# Altium PCB BullCoolerShield.PcbDoc
Units mil, origin at the board's own origin, x right, y up, seen from the top; angles counter-clockwise.
Board outline 2105 x 3990 mil, 4 copper layers (Top Plane, Signal Plane, Ground Plane, Power Plane), stack 30.634 mil thick; 100 components, 63 nets, 344 pads, 69 vias.
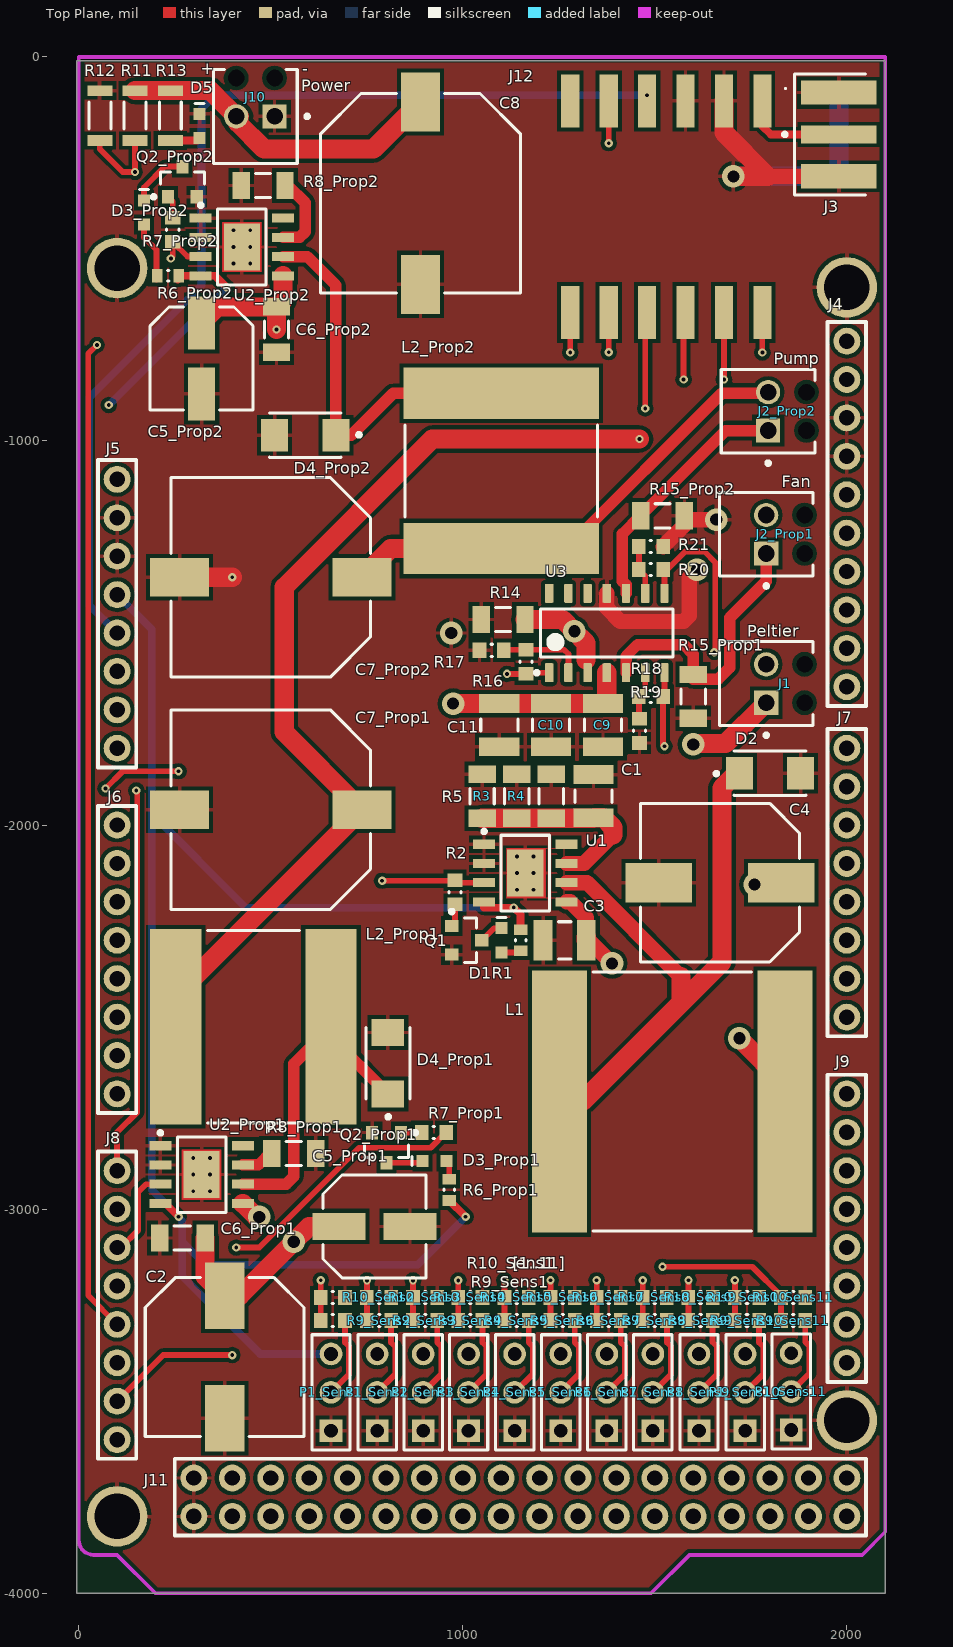
[diagram p0: Top Plane view]
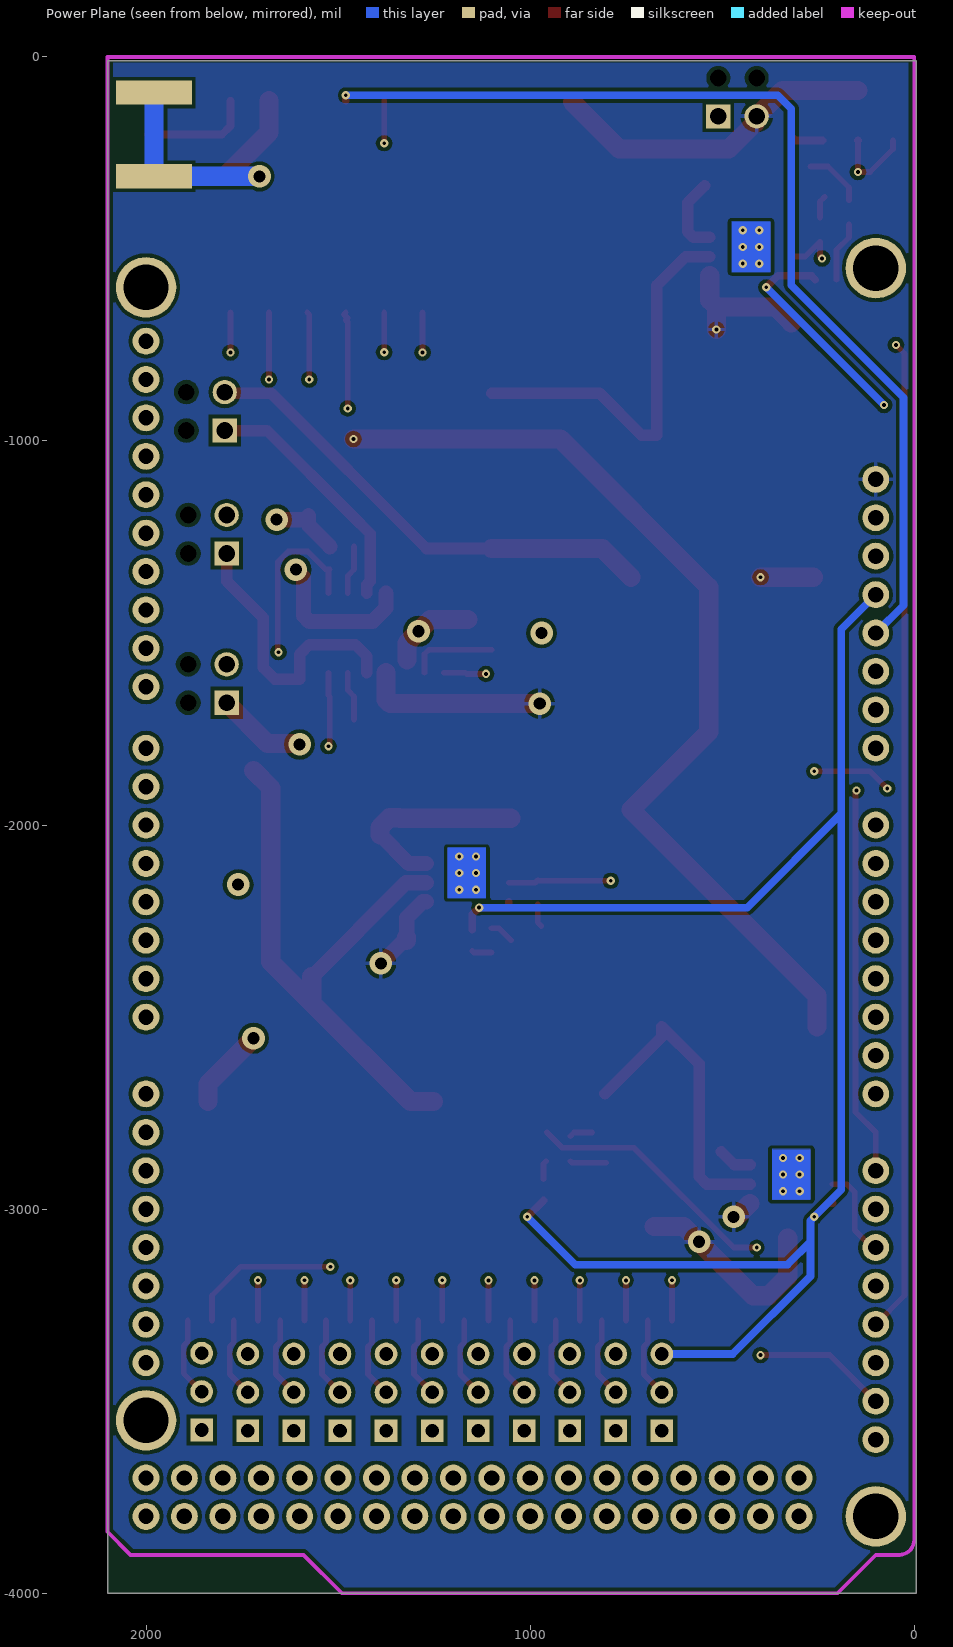
[diagram p1: Power Plane view, seen from below]
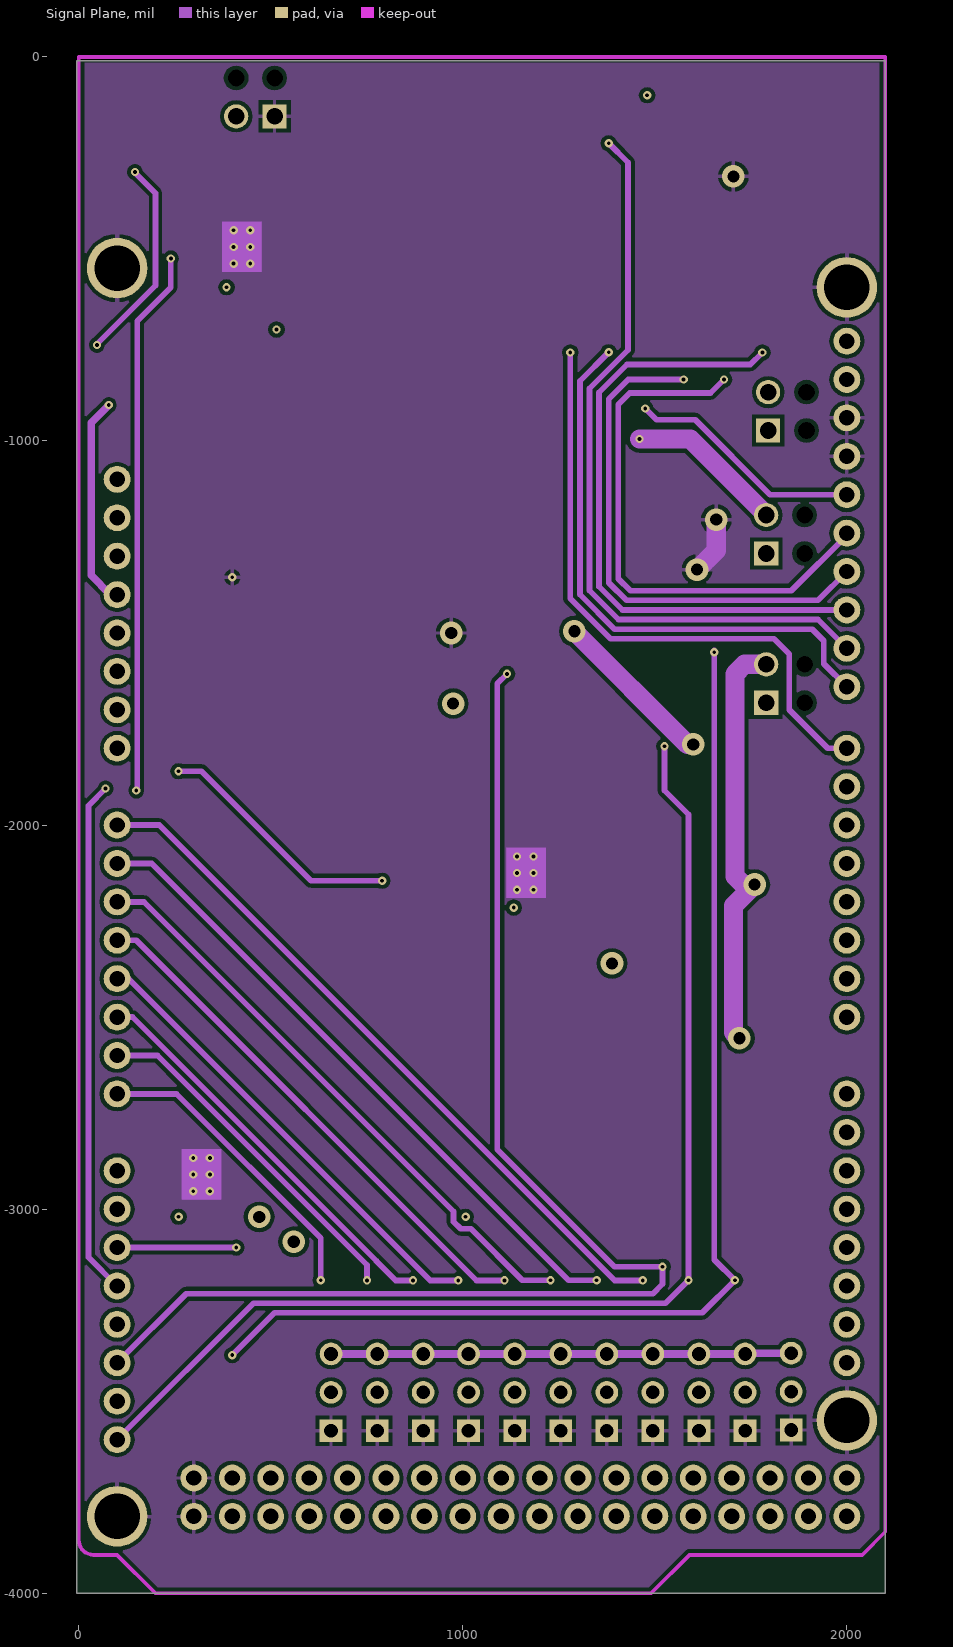
[diagram p2: Signal Plane]
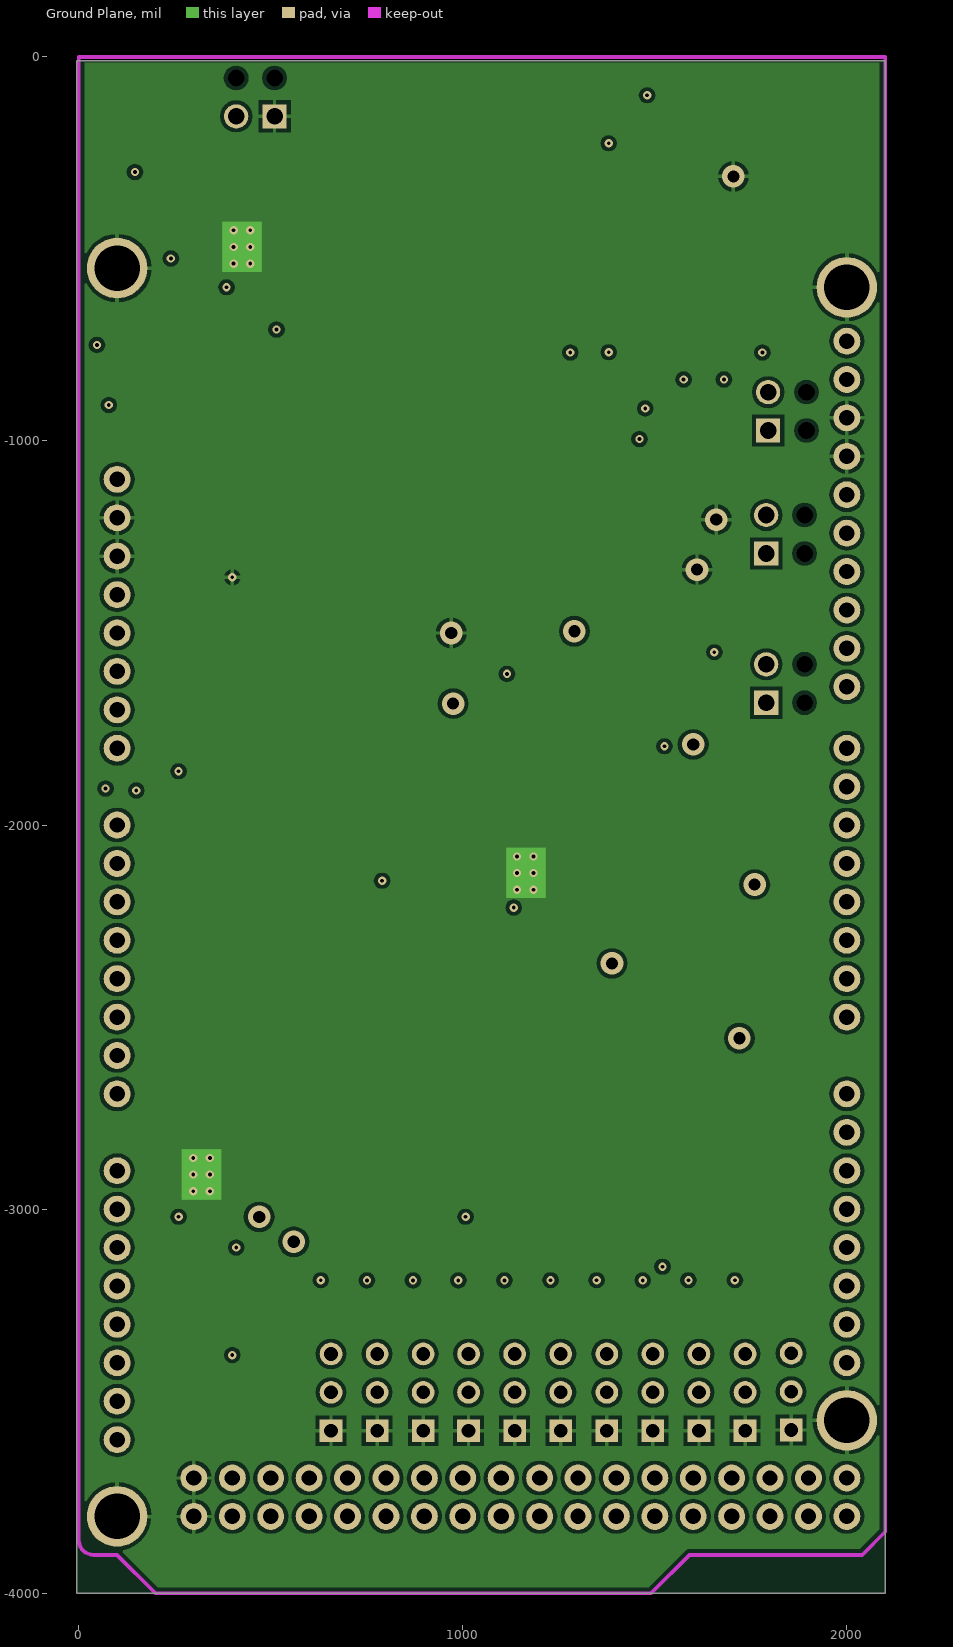
[diagram p3: Ground Plane]

## Layer stack, top to bottom
Top Solder: solder mask 0.4, Solder Resist, Dk 3.5
Top Plane: signal copper 1.4
Dielectric 1: core 10, FR-4, Dk 4.2
Signal Plane: signal copper 1.417
Dielectric 3: prepreg 5, Dk 4.2
Ground Plane: signal copper 1.417
Dielectric 2: core 10, Dk 4.2
Power Plane: signal copper 1.4
Solder Side: solder mask 0.4, Solder Resist, Dk 3.5

## Board outline
-5,-4000 2100,-4000 2100,-10 -5,-10

## Design rules (kind name [scope] priority, off if disabled: settings)
Clearance [All] p1: gap=10 ignorepadtopadclearanceinfootprint=TRUE except(0: Arc-Hole Track-Hole SMDPad-Hole THPad-Hole Via-Hole Fill-Hole Poly-Hole Region-Hole Text-Hole)
PolygonConnect [All] p1: connectstyle=Relief reliefconductorwidth=10 reliefentries=4 polygonreliefangle="90 Angle" airgapwidth=10
RoutingVias RoutingVias_2 [InNetClass('HC4')] p1: holewidth=31.5 width=59.06 viastyle="Through Hole" minholewidth=31.5 minwidth=59.06 maxholewidth=31.5 maxwidth=59.06
RoutingVias RoutingVias_1 [InNetClass('HC')] p2: holewidth=15.75 width=27.56 viastyle="Through Hole" minholewidth=15.75 minwidth=27.56 maxholewidth=15.75 maxwidth=27.56
RoutingVias [All] p3: holewidth=9.84 width=21.65 viastyle="Through Hole" minholewidth=9.84 minwidth=21.65 maxholewidth=9.84 maxwidth=21.65
SolderMaskExpansion [All] p1: expansion=4
Width Width_2 [InNetClass('HC4')] p1: maxlimit=500 minlimit=40 preferedwidth=60 toplayer_maxwidth=100 midlayer1_minwidth=50 midlayer1_maxwidth=100 midlayer2_minwidth=50 bottomlayer_minwidth=50 bottomlayer_maxwidth=100 minimp=50.000000 maximp=50.000000 favimp=50.000000
Width Width_1 [InNetClass('HC')] p2: maxlimit=100 minlimit=30 preferedwidth=50 minimp=50.000000 maximp=50.000000 favimp=50.000000
Width [All] p3: maxlimit=20 minlimit=10 preferedwidth=15 minimp=50.000000 maximp=50.000000 favimp=50.000000
30 further rules are at their usual default settings.

## Classes and differential pairs
net class HC4: +12 AGND NetC1_2 NetC4_1 NetD2_1 NetJ1_1
net class SENS[1..2]: SENS1 SENS2
channel class TemperatureSensor: Sens1 Sens2 Sens3 Sens4 Sens5 Sens6 Sens7 Sens8 Sens9 Sens10 Sens11
channel class ProportionalDrive: Prop1 Prop2
net class PWM[1..2]: PWM1 PWM2
net class HC: +12 AGND NetC7_Prop1_1 NetC7_Prop2_1 NetD4_Prop1_1 NetD4_Prop2_1 NetR8_Prop1_2 NetR8_Prop2_2 SENS1 SENS2
net class AI[1..8]: AI1 AI2 AI3 AI4 AI5 AI6 AI7 AI8 AI9 AI10 AI11
component class TopSheet: C8 C9 C10 C11 D5 J3 J4 J5 J6 J7 J8 J9 J10 J11 J12 R11 R12 R13 R16 R17 R18 R19 R20 R21 U3
component class Sens11: P1_Sens11 R9_Sens11 R10_Sens11
component class Sens10: P1_Sens10 R9_Sens10 R10_Sens10
component class Sens9: P1_Sens9 R9_Sens9 R10_Sens9
component class Sens8: P1_Sens8 R9_Sens8 R10_Sens8
component class Sens7: P1_Sens7 R9_Sens7 R10_Sens7
component class Sens6: P1_Sens6 R9_Sens6 R10_Sens6
component class Sens5: P1_Sens5 R9_Sens5 R10_Sens5
component class Sens4: P1_Sens4 R9_Sens4 R10_Sens4
component class Sens3: P1_Sens3 R9_Sens3 R10_Sens3
component class Sens2: P1_Sens2 R9_Sens2 R10_Sens2
component class Sens1: P1_Sens1 R9_Sens1 R10_Sens1
component class Prop2: C5_Prop2 C6_Prop2 C7_Prop2 D3_Prop2 D4_Prop2 J2_Prop2 L2_Prop2 Q2_Prop2 R6_Prop2 R7_Prop2 R8_Prop2 R15_Prop2 U2_Prop2
component class Prop1: C5_Prop1 C6_Prop1 C7_Prop1 D3_Prop1 D4_Prop1 J2_Prop1 L2_Prop1 Q2_Prop1 R6_Prop1 R7_Prop1 R8_Prop1 R15_Prop1 U2_Prop1
component class Designator: C1 C2 C3 C4 D1 D2 J1 L1 Q1 R1 R2 R3 R4 R5 R14 U1

## Components (designator, comment, footprint, x,y, rotation, side; value= is the part's Value field where it differs from the comment)
C1 "100nF C-1206" C-1206 1340.45,-1925 r270 top value=100nF
C2 "220uF 50V Poly" CAPAE127P600-8N 380,-3385 r270 top
C3 "100nF C-1206" C-1206 1265.45,-2300 r0 top value=100nF
C4 "220uF 50V Poly" CAPAE127P600-8N 1670,-2150 r180 top
C5_Prop1 "47uF 50V AuPoly" EEH-ZA1H220P 770,-3045 r0 top (schematic designator C5)
C5_Prop2 "47uF 50V AuPoly" EEH-ZA1H220P 320,-785 r270 top (schematic designator C5)
C6_Prop1 "10uF 50V 1206" CAPC1206(3216)190_N 270,-3075 r0 top value=10uF (schematic designator C6)
C6_Prop2 "10uF 50V 1206" CAPC1206(3216)190_N 515,-710 r90 top value=10uF (schematic designator C6)
C7_Prop1 "470uF 50V AuPoly" CAPAE137130X163M 500,-1960 r180 top (schematic designator C7)
C7_Prop2 "470uF 50V AuPoly" CAPAE137130X163M 500,-1355 r180 top (schematic designator C7)
C8 "470uF 50V AuPoly" CAPAE137130X163M 890,-355 r270 top
C9 "100nF C-1206" C-1206 1365,-1740 r90 top value=100nF
C10 "100nF C-1206" C-1206 1230,-1740 r90 top value=100nF
C11 "100nF C-1206" C-1206 1095,-1740 r90 top value=100nF
D1 "LED Green" 0603_A 1100.45,-2300 r270 top
D2 "SK34A" FP-DO-214AC-MFG 1800,-1865 r0 top
D3_Prop1 "LED Green" 0603_A 926.5,-2875 r0 top (schematic designator D3)
D3_Prop2 "LED Green" 0603_A 170,-405 r270 top (schematic designator D3)
D4_Prop1 "SK34A" FP-DO-214AC-MFG 805,-2620 r90 top (schematic designator D4)
D4_Prop2 "SK34A" FP-DO-214AC-MFG 590,-985 r180 top (schematic designator D4)
D5 "LED Green" 0603_A 315,-180 r270 top
J1 "1725656" PHOE-1725656-2 1790,-1631.5 r90 top
J2_Prop1 "1725656" PHOE-1725656-2 1790,-1242.91 r90 top (schematic designator J2)
J2_Prop2 "1725656" PHOE-1725656-2 1795,-922.91 r90 top (schematic designator J2)
J3 "CON-SMA-EDGE-S" FP-CON-SMA-EDGE-S-MFG 2265,-202.01 r270 top
J4 "Header10x1" Header10x1 2000,-740 r270 top
J5 "Header8x1" Header8x1 100,-1800 r90 top
J6 "Header8x1" Header8x1 100,-2700 r90 top
J7 "Header8x1" Header8x1 2000,-1800 r270 top
J8 "Header8x1" Header8x1 100,-3600 r90 top
J9 "Header8x1" Header8x1 2000,-2700 r270 top
J10 "1725656" PHOE-1725656-2 460,-155 r180 top
J11 "Header18x2" Header18x2 2000,-3700 r180 top
J12 "Zeta433" Zeta433-SM 1530,-390 r270 top
L1 "100uH" INDC177172X70N 1545.45,-2720 r0 top
L2_Prop1 "330uH" L1212 455,-2525 r180 top (schematic designator L2)
L2_Prop2 "330uH" L1212 1100,-1078.03 r270 top (schematic designator L2)
P1_Sens1 "Header 3" HDR1X3 656.94,-3577 r90 top (schematic designator P1)
P1_Sens2 "Header 3" HDR1X3 776.94,-3577 r90 top (schematic designator P1)
P1_Sens3 "Header 3" HDR1X3 896.94,-3577 r90 top (schematic designator P1)
P1_Sens4 "Header 3" HDR1X3 1015,-3577 r90 top (schematic designator P1)
P1_Sens5 "Header 3" HDR1X3 1135,-3577 r90 top (schematic designator P1)
P1_Sens6 "Header 3" HDR1X3 1255,-3577 r90 top (schematic designator P1)
P1_Sens7 "Header 3" HDR1X3 1375,-3577 r90 top (schematic designator P1)
P1_Sens8 "Header 3" HDR1X3 1495,-3577 r90 top (schematic designator P1)
P1_Sens9 "Header 3" HDR1X3 1615,-3577 r90 top (schematic designator P1)
P1_Sens10 "Header 3" HDR1X3 1735,-3577 r90 top (schematic designator P1)
P1_Sens11 "Header 3" HDR1X3 1855,-3575 r90 top (schematic designator P1)
Q1 "BC846BLT3G" ONSC-SOT-23-3-318-08_V 1010.45,-2300 r0 top
Q2_Prop1 "BC846BLT3G" ONSC-SOT-23-3-318-08_V 801.5,-2840 r270 top (schematic designator Q2)
Q2_Prop2 "BC846BLT3G" ONSC-SOT-23-3-318-08_V 270,-325 r90 top (schematic designator Q2)
R1 "500R" RESC0603(1608)_L 1150.45,-2300 r90 top value="510.00 Ohm"
R2 "10K" RESC0603(1608)_N 980,-2175 r270 top value="10000.00 Ohm"
R3 "1R 1206" RESC1206(3216)_N 1050.45,-1925 r270 top value="1.20 Ohm"
R4 "1R 1206" RESC1206(3216)_N 1140.45,-1925 r270 top value="1.20 Ohm"
R5 "1R 1206" RESC1206(3216)_N 1230.45,-1925 r270 top value="1.20 Ohm"
R6_Prop1 "500R" RESC0603(1608)_L 965,-2950 r270 top value="510.00 Ohm" (schematic designator R6)
R6_Prop2 "500R" RESC0603(1608)_L 232.6,-570 r0 top value="510.00 Ohm" (schematic designator R6)
R7_Prop1 "10K" RESC0603(1608)_N 925,-2800 r180 top value="10000.00 Ohm" (schematic designator R7)
R7_Prop2 "10K" RESC0603(1608)_N 245,-450 r90 top value="10000.00 Ohm" (schematic designator R7)
R8_Prop1 "1R 1206" RESC1206(3216)_N 560,-2855 r180 top value="1.20 Ohm" (schematic designator R8)
R8_Prop2 "1R 1206" RESC1206(3216)_N 480,-335 r0 top value="1.20 Ohm" (schematic designator R8)
R9_Sens1 "2K7" RESC0603(1608)_N 661.94,-3290 r0 top value="10000.00 Ohm" (schematic designator R9)
R9_Sens2 "2K7" RESC0603(1608)_N 781.94,-3290 r0 top value="10000.00 Ohm" (schematic designator R9)
R9_Sens3 "2K7" RESC0603(1608)_N 901.94,-3290 r0 top value="10000.00 Ohm" (schematic designator R9)
R9_Sens4 "2K7" RESC0603(1608)_N 1020,-3290 r0 top value="10000.00 Ohm" (schematic designator R9)
R9_Sens5 "2K7" RESC0603(1608)_N 1140,-3290 r0 top value="10000.00 Ohm" (schematic designator R9)
R9_Sens6 "2K7" RESC0603(1608)_N 1260,-3290 r0 top value="10000.00 Ohm" (schematic designator R9)
R9_Sens7 "2K7" RESC0603(1608)_N 1380,-3290 r0 top value="10000.00 Ohm" (schematic designator R9)
R9_Sens8 "2K7" RESC0603(1608)_N 1500,-3290 r0 top value="10000.00 Ohm" (schematic designator R9)
R9_Sens9 "2K7" RESC0603(1608)_N 1618.95,-3290 r0 top value="10000.00 Ohm" (schematic designator R9)
R9_Sens10 "2K7" RESC0603(1608)_N 1740,-3290 r0 top value="10000.00 Ohm" (schematic designator R9)
R9_Sens11 "2K7" RESC0603(1608)_N 1860,-3290 r0 top value="10000.00 Ohm" (schematic designator R9)
R10_Sens1 "3K3" RESC0603(1608)_N 661.94,-3230 r180 top value="10000.00 Ohm" (schematic designator R10)
R10_Sens2 "3K3" RESC0603(1608)_N 781.94,-3230 r180 top value="10000.00 Ohm" (schematic designator R10)
R10_Sens3 "3K3" RESC0603(1608)_N 901.94,-3230 r180 top value="10000.00 Ohm" (schematic designator R10)
R10_Sens4 "3K3" RESC0603(1608)_N 1020,-3230 r180 top value="10000.00 Ohm" (schematic designator R10)
R10_Sens5 "3K3" RESC0603(1608)_N 1140,-3230 r180 top value="10000.00 Ohm" (schematic designator R10)
R10_Sens6 "3K3" RESC0603(1608)_N 1260,-3230 r180 top value="10000.00 Ohm" (schematic designator R10)
R10_Sens7 "3K3" RESC0603(1608)_N 1380,-3230 r180 top value="10000.00 Ohm" (schematic designator R10)
R10_Sens8 "3K3" RESC0603(1608)_N 1500,-3230 r180 top value="10000.00 Ohm" (schematic designator R10)
R10_Sens9 "3K3" RESC0603(1608)_N 1618.95,-3230 r180 top value="10000.00 Ohm" (schematic designator R10)
R10_Sens10 "3K3" RESC0603(1608)_N 1740,-3230 r180 top value="10000.00 Ohm" (schematic designator R10)
R10_Sens11 "3K3" RESC0603(1608)_N 1860,-3230 r180 top value="10000.00 Ohm" (schematic designator R10)
R11 "10K5 1206" R-1206 146.5,-152.8 r90 top value="10000.00 Ohm"
R12 "3K3 1206" R-1206 55,-152.8 r270 top value="10000.00 Ohm"
R13 "2K5 1206" R-1206 238.5,-152.8 r90 top value="10000.00 Ohm"
R14 "10m 1206" RESC1206(3216)_N 1105,-1465 r0 top value="1.20 Ohm"
R15_Prop1 "10m 1206" RESC1206(3216)_N 1600,-1665 r90 top value="1.20 Ohm" (schematic designator R15)
R15_Prop2 "10m 1206" RESC1206(3216)_N 1520,-1195 r180 top value="1.20 Ohm" (schematic designator R15)
R16 "2M5" RESC0603(1608)_N 1165,-1575 r270 top value="10000.00 Ohm"
R17 "5K" RESC0603(1608)_N 1075,-1545 r0 top value="10000.00 Ohm"
R18 "990K" RESC0603(1608)_N 1490,-1665 r0 top value="10000.00 Ohm"
R19 "10K" RESC0603(1608)_N 1460,-1755 r90 top value="10000.00 Ohm"
R20 "990K" RESC0603(1608)_N 1490,-1335 r0 top value="10000.00 Ohm"
R21 "10K" RESC0603(1608)_N 1490,-1275 r180 top value="10000.00 Ohm"
U1 "DRV8870" SOIC127P600X170_HS-9N 1162.72,-2125 r0 top
U2_Prop1 "DRV8870" SOIC127P600X170_HS-9N 320,-2910 r0 top (schematic designator U2)
U2_Prop2 "DRV8870" SOIC127P600X170_HS-9N 425,-495 r0 top (schematic designator U2)
U3 "LM324MX" D0014A_L 1375,-1500 r90 top

## Footprints (in the part's own frame and the unit in brackets; to place one, negate y for a bottom-side part, rotate by r counter-clockwise, add the part's x,y. Pads: shape width x height; smd on the part's side, far side on the other; paste and mask are expansions set on the pad)
0603_A [mm] "Chip LED, 2-Leads, Body 1.6x0.8mm, IPC Medium Density"
  rect 0.8x0.8 smd: 1(-0.8,0) 2(0.8,0)
  silkscreen extent -1.5,-0.3 -1.5,0.3, body extent -0.8,-0.4 0.8,0.4, height 0.7
C-1206 [mm]
  rect 1.25x2.65 smd: 1(-1.425,0) 2(1.425,0)
  silkscreen extent -0.4,-1.22 0.4,1.23, body extent -1.65,-1.3 1.65,1.3, height 2.5
CAPAE127P600-8N [mm] "Aluminium Polymer Capacitor"
  rect 4.4x2.6 smd: 1(-4.05,0) 2(4.05,0)
  silkscreen extent -5.25,-5.25 5.25,5.25, body extent -5.25,-5.25 5.25,5.25, height 16.8
CAPAE137130X163M [mm] "Aluminum Electrolytic Capacitor, Body 13.00x13.00x16.30mm, IPC Low Density"
  rect 3.9x2.55 smd: 1(-6.025,0) 2(6.025,0)
  silkscreen extent -6.6,-6.6 6.6,6.6, body extent -6.85,-6.6 6.85,6.6, height 16.3
CAPC1206(3216)190_N [mm] "Chip Capacitor, Body 3.2x1.6mm, Height 1.9mm, IPC Medium Density"
  rect 1.15x1.8 smd: 1(-1.5,0) 2(1.5,0)
  silkscreen extent -0.55,-0.8 0.55,0.8, body extent -1.7,-0.9 1.7,0.9, height 1.9
D0014A_L [mm] "SOIC, 14-Leads, Body 8.75x4mm, Pitch 1.27mm, IPC High Density"
  rrect18% 1.25x0.55 smd: 1(-2.625,3.81) 2(-2.625,2.54) 3(-2.625,1.27) 4(-2.625,0) 5(-2.625,-1.27) 6(-2.625,-2.54) 7(-2.625,-3.81) 8(2.625,-3.81) 9(2.625,-2.54) 10(2.625,-1.27) 11(2.625,0) 12(2.625,1.27) 13(2.625,2.54) 14(2.625,3.81)
  silkscreen extent -2.75,-4.38 1.6,4.76, body extent -3.02,-4.32 3.02,4.32, height 1.59
EEH-ZA1H220P [mm] "Aluminium Polymer"
  rect 3.5x1.8 smd: 1(-2.35,0) 2(2.35,0)
  silkscreen extent -3.4,-3.4 3.4,3.4, body extent -3.4,-3.4 3.4,3.4, height 6.1
FP-CON-SMA-EDGE-S-MFG [mm]
  rect 1.2x5 smd paste+0 mask+0: 1(0,-7.26)
  rect 1.6x5 smd paste+0 mask+0: 2(-2.77,-7.26) 3(2.77,-7.26)
  rect 1.6x5 smd far side paste+0 mask+0: 4(-2.77,-7.26) 5(2.77,-7.26)
  silkscreen extent -4,-10.96 4,-5.5, body extent -3.67,-9.86 3.67,4.86, height 0.25
FP-DO-214AC-MFG [mm]
  rect 1.78x2.16 smd paste+0 mask+0: 1(-2.025,0) 2(2.025,0)
  silkscreen extent -3.67,-1.46 2.37,1.46, body extent -3.02,-1.56 3.02,1.56, height 0.25
HDR1X3 [mm] "Connector; Header; 3 Position"
  rect 1.5x1.5 hole 0.9: 1(0,0)
  round 1.5 hole 0.9: 2(2.54,0) 3(5.08,0)
  silkscreen extent -1.27,-1.27 6.35,1.27
Header8x1 [mil]
  round 70 hole 40: 1(0,0) 2(100,0) 3(200,0) 4(300,0) 5(400,0) 6(500,0) 7(600,0) 8(700,0)
  silkscreen extent -50,-50 750,50
Header10x1 [mil]
  round 70 hole 40: 1(0,0) 2(100,0) 3(200,0) 4(300,0) 5(400,0) 6(500,0) 7(600,0) 8(700,0) 9(800,0) 10(900,0)
  silkscreen extent -50,-50 950,50
Header18x2 [mil]
  round 70 hole 40: 1(0,0) 2(0,100) 3(100,0) 4(100,100) 5(200,0) 6(200,100) 7(300,0) 8(300,100) 9(400,0) 10(400,100) 11(500,0) 12(500,100) 13(600,0) 14(600,100) 15(700,0) 16(700,100) 17(800,0) 18(800,100) 19(900,0) 20(900,100) 21(1000,0) 22(1000,100) 23(1100,0) 24(1100,100) 25(1200,0) 26(1200,100) 27(1300,0) 28(1300,100) 29(1400,0) 30(1400,100) 31(1500,0) 32(1500,100) 33(1600,0) 34(1600,100) 35(1700,0) 36(1700,100)
  silkscreen extent -50,-50 1750,150
INDC177172X70N [mm] "Chip Inductor, 2-Leads, Body 17.70x17.20mm, IPC Medium Density"
  rect 3.65x17.34 smd: 1(-7.455,0) 2(7.455,0)
  silkscreen extent -5.25,-8.57 5.25,8.57, body extent -8.85,-8.6 8.85,8.6, height 7
L1212 [mm]
  rect 3.4x12.94 smd: 1(-5.13,0) 2(5.13,0)
  silkscreen extent -3.05,-6.37 3.05,6.37, body extent -6.4,-6.4 6.4,6.4, height 10
ONSC-SOT-23-3-318-08_V [mm] "SOT23, 3-Leads, Body 2.92x1.3mm, Pitch 0.95mm"
  rect 0.9x0.8 smd: 1(-1,0.95) 2(-1,-0.95) 3(1,0)
  silkscreen extent -1.12,-1.46 0.65,2.02, body extent -0.65,-1.46 0.65,1.46, height 1.11
PHOE-1725656-2 [mm] "Connector, 2-Leads, Body 6.2x5.4mm, Pitch 2.54mm"
  rect 1.6x1.6 hole 1.1: 1(-1.27,0)
  round 1.6 hole 1.1: 2(1.27,0)
  round 0 hole 1.1 unplated: MH1(-1.27,-2.54) MH2(1.27,-2.54)
  silkscreen extent -3.54,-3.1 2.77,3.1, body extent -2.77,-3.1 2.77,3.1, height 9
R-1206 [mm]
  rect 0.7x1.65 smd: 1(-1.65,0) 2(1.65,0)
  silkscreen extent -0.9,-0.72 0.9,0.72, body extent -1.6,-0.8 1.6,0.8, height 0.55
RESC0603(1608)_L [mm] "Chip Resistor, Body 1.6x0.8mm, IPC High Density"
  rect 0.7x0.9 smd: 1(-0.7,0) 2(0.7,0)
  silkscreen extent -0.05,-0.35 0.05,0.35, body extent -0.85,-0.47 0.85,0.47, height 0.6
RESC0603(1608)_N [mm] "Chip Resistor, Body 1.6x0.8mm, IPC Medium Density"
  rect 0.9x1 smd: 1(-0.8,0) 2(0.8,0)
  silkscreen extent -0.05,-0.4 0.05,0.4, body extent -0.85,-0.47 0.85,0.47, height 0.6
RESC1206(3216)_N [mm] "Chip Resistor, Body 3.2x1.6mm, IPC Medium Density"
  rect 1.15x1.8 smd: 1(-1.45,0) 2(1.45,0)
  silkscreen extent -0.5,-0.8 0.5,0.8, body extent -1.67,-0.87 1.67,0.87, height 0.75
SOIC127P600X170_HS-9N [mm] "SOIC, 8-Leads, Body 4.90x3.90mm, Pitch 1.27mm, Thermal Pad 3.10x2.40mm, IPC Medium Density"
  rect 1.45x0.6 smd: 1(-2.725,1.905) 2(-2.725,0.635) 3(-2.725,-0.635) 4(-2.725,-1.905) 5(2.725,-1.905) 6(2.725,-0.635) 7(2.725,0.635) 8(2.725,1.905)
  rect 2.4x3.1 smd: 1(0,0)
  silkscreen extent -2.85,-2.5 1.6,2.88, body extent -3,-2.5 3,2.5, height 1.7
Zeta433-SM [mm] "Chip Array, Concave, 12-Leads, Pitch 2.54mm,  Body 16.00x16.50mm,  IPC Medium Density"
  rect 3.5x1.2 smd: 1(-7,6.35) 2(-7,3.81) 3(-7,1.27) 4(-7,-1.27) 5(-7,-3.81) 6(-7,-6.35) 7(7,-6.35) 8(7,-3.81) 9(7,-1.27) 10(7,1.27) 11(7,3.81) 12(7,6.35)
  silkscreen extent -7.86,7.84 -7.76,7.94, body extent -8.3,-8 8.3,8, height 2

## Part data
C1 C3 C9 C10 C11: library part C-1206, "Ceramic 50V 1206", Case-EIA=1206, Case-Metric=3216, Rated Voltage="50 V", Tolerance=±20%, Max Thickness="1 mm", Technology=SMT
C2 C4 C5_Prop1 C5_Prop2 C7_Prop1 C7_Prop2 C8: library part C-Poly, Capacitance=22000000pF, Case Code=D, Case Style=Molded, Manufacturer=AVX, Operating Temp Range=-55Cto125C, Package / Case=7343-31, Package Description="2-Pin Surface Mount Device, Body 7.3 x 4.35 mm", Tolerance (+ or -)=10%, Voltage=25VDC, Construction=SMTChip, Datasheet URL=https://datasheet.ciiva.com/11793/0900766b80066cb4-11793194.pdf, Datasheet Version=02/2004, DCL=5.5uA, DELETED=Compliant, DF=6%, ESR=0.2ohm, Failure Rate=NotRequired, Insulation=NotRequired, Lead Spacing (nom)=NotRequiredmm, Length W/Weld=NotRequiredmm, Length W/Weld (max)=NotRequiredmm, Manufacturer URL=http://www.avx.com/, Mounting Style=SurfaceMount, Mounting Technology=SurfaceMount, Package Reference=7343-31, Packaging=TapeandReel, Polarity=Polar, Product Depth (mm)=4.3mm, Product Diameter (mm)=NotRequiredmm, Product Height (mm)=2.9mm, Product Length (mm)=7.3mm, Rad Hardened=No, Seal=NotRequired, Seated Plane Height=NotRequiredmm, Wire Form=NotRequired
C6_Prop1 C6_Prop2: library part CMP-1037-04983-1, "CAP 10uF 50V ±20% 1206 (3216 Metric) Thickness 1.9mm SMD", Case-EIA=1206, Case-Metric=3216, Rated Voltage="50 V", Tolerance=±20%, Max Thickness="1.9 mm", Technology=SMT
D1 D3_Prop1 D3_Prop2 D5: library part CMP-1426-00002-1, "SMD mono-color Chip LED, WL-SMCW, Green", Color=Green, Manufacturer="Wuerth Elektronik", PartNumber=150060GS75000, ComponentLink1Description="Manufacturer URL", ComponentLink1URL=http://www.we-online.com, ComponentLink2Description=Datasheet, ComponentLink2URL=http://katalog.we-online.com/led/datasheet/150060GS75000.pdf, PackageReference=0603_A
D2 D4_Prop1 D4_Prop2: library part CMP-56206-000004-1, "DIODE SCHOTTKY 5A 30V SMA", Average Rectified Current=5A, Case/Package=SMA, Max Reverse Voltage (DC)=30V, Mount="Surface Mount", Packaging="Tape and Reel"
J1 J2_Prop1 J2_Prop2 J10: library part CMP-2000-05299-1, "Male Header, Pitch 2.54 mm, 1 x 2 Position, Height 9 mm, Tail Length 3.5 mm", Colour=Green, Manufacturer="Phoenix Contact", Content=250pc(s), Datasheet URL=http://datasheet.octopart.com/1725656-Phoenix-Contact-datasheet-5302866.pdf, Datasheet Version=Apr-08, Industrial packaging=Yes, Manufacturer part No.=1725656, Manufacturer URL=http://www.phoenixcontact.com/, Number of contacts=2, Pitch=2.54mm, Type=MPT0,5/2-2,54
J3: library part CMP-204357-000001-1, "CONN SMA JACK STR EDGE MNT", Frequency=18GHz, Manufacturer="RF Solutions Ltd.", Package=CONN_JACK, Automotive=No, Category=Conn, ComponentLink2Description=Datasheet, ComponentLink2URL=https://www.rfsolutions.co.uk/downloads/1498648656DS-CON-EDGE-SMA-4.pdf, Conn Orientation="Right Angle", Contact Material=Gold, Device Class L1=Connectors, Device Class L2="RF / Coaxial Connectors", Device Class L3=unset, Digikey Description="CONN SMA JACK STR EDGE MNT", Footprint Url=https://forum.upverter.com/uploads/default/original/3X/b/e/be75b907af57498775929d6d9099689c472e0307.pdf, Height=6.35mm, Impedance=50O, Is Female=yes, Lead Free=Yes, Manufacturer Part Number=CON-SMA-EDGE-S, Number of contacts=1, Octopart=https://octopart.com/con-sma-edge-s-rf+solutions-70967450, RoHS=TRUE, Shielding=true
L1: library part Inductor1717, "PA4344.104NLT / https://products.pulseelex.com/files/product_files/P771.pdf", Inductance="1.50 µH", Manufacturer="Wuerth Elektronik", PartNumber=74479763215, ComponentLink1Description="Manufacturer URL", ComponentLink1URL=http://www.we-online.com, ComponentLink2Description=Datasheet, ComponentLink2URL=http://katalog.we-online.de/kataloge/eisos/media/pdf/74479763215.pdf, PackageReference="SMD 0603_A"
L2_Prop1 L2_Prop2: library part Inductor1212, Inductance="1.50 µH", Manufacturer="Wuerth Elektronik", PartNumber=74479763215, ComponentLink1Description="Manufacturer URL", ComponentLink1URL=http://www.we-online.com, ComponentLink2Description=Datasheet, ComponentLink2URL=http://katalog.we-online.de/kataloge/eisos/media/pdf/74479763215.pdf, PackageReference="SMD 0603_A"
P1_Sens1 P1_Sens2 P1_Sens3 P1_Sens4 P1_Sens5 P1_Sens6 P1_Sens7 P1_Sens8 P1_Sens9 P1_Sens10 P1_Sens11: "Header, 3-Pin", LatestRevisionDate=17-Jul-2002, LatestRevisionNote="Re-released for DXP Platform.", Publisher="Altium Limited"
Q1 Q2_Prop1 Q2_Prop2: library part CMP-1048-00780-1, "General Purpose Transistor, NPN Silicon, 3-Pin SOT-23, Pb-Free, Tape and Reel", Manufacturer="On Semiconductor", ComponentLink1Description="Manufacturer URL", ComponentLink1URL=http://www.onsemi.com/, ComponentLink2Description=Datasheet, ComponentLink2URL=http://www.onsemi.cn/pub_link/Collateral/BC846ALT1-D.PDF, ComponentLink3Description="Package Specification", ComponentLink3URL=http://www.onsemi.cn/pub_link/Collateral/318-08.PDF, DatasheetVersion="Rev. 11", fT Min (MHz)=100, IC Continuous (A)=0.1, Mounting Technology="Surface Mount", PackageDescription="3-Pin Small Outline Transistor, Body 2.92 x 1.3 mm, Pitch 0.95 mm", PackageReference=SOT-23-3-318-08, PackageVersion="Rev. AP, 11/2009", Packing="Tape and Reel", PartNumber=BC846BLT3G, Polarity=NPN, RoHS=TRUE
R1 R6_Prop1 R6_Prop2: library part CMP-1012-00067-1, "510R 0.1W 5% 0603 (1608 Metric)  SMD", Case-EIA=0603, Case-Metric=1608, Power="0.1 W", Tolerance="5 %", Technology=SMT
R2 R7_Prop1 R7_Prop2 R9_Sens1 R9_Sens2 R9_Sens3 R9_Sens4 R9_Sens5 R9_Sens6 R9_Sens7 R9_Sens8 R9_Sens9 R9_Sens10 R9_Sens11 R10_Sens1 R10_Sens2 R10_Sens3 R10_Sens4 R10_Sens5 R10_Sens6 R10_Sens7 R10_Sens8 R10_Sens9 R10_Sens10 R10_Sens11 R16 R17 R18 R19 R20 R21: library part CMP-1012-00623-1, "10K 0.1W 1% 0603 (1608 Metric)  SMD", Case-EIA=0603, Case-Metric=1608, Power="0.1 W", Tolerance="1 %", Technology=SMT
R3 R4 R5 R8_Prop1 R8_Prop2 R14 R15_Prop1 R15_Prop2: library part CMP-1014-00004-1, "1R2 0.25W 5% 1206 (3216 Metric)  SMD", Case-EIA=1206, Case-Metric=3216, Power="0.25 W", Tolerance="5 %", Technology=SMT
R11 R12 R13: library part R-1206, "0.25W 1206", Case-EIA=0603, Case-Metric=1608, Power="0.1 W", Tolerance="1 %", Technology=SMT
U3: library part CMP-0055-00741-3, "Low Power Quad Operational Amplifier, 14-pin Narrow SOIC", Manufacturer="Texas Instruments", Package Reference=D0014A, PackageTopMarking=NSUZXYTTE#*LM324M, PowerWise=N, Code_IPC=SOIC127P600-14, Code_JEDEC=MS-012AB, ComponentLink1Description="Datasheet URL", ComponentLink1URL=http://www.ti.com/general/docs/lit/getliterature.tsp?genericPartNumber=LM324-N&fileType=pdf, CompType=Amplifiers, PackageDescription="Molded Package S.O., .150in Wide, 14 Lead", PinCount=14, RoHS=N

## Free pads (board coordinates)
  round 157.48 hole 118.11: 5(100,-3800) 5(100,-550) 5(2000,-3550) 5(2000,-600)

## Via types
v1: diameter 21.65, hole 9.84, Top Plane to Power Plane, 57 vias
v2: diameter 59.06, hole 31.5, Top Plane to Power Plane, 12 vias

## Nets (pads, with @x,y where several pads share a name; then routed paths per layer and width w, separated by ;. In a path a pad name is that pad's centre, name@x,y a point inside that pad or via, vN(x,y) a via of type N, cw(c..) or ccw(c..) an arc to the next point about the centre after c; other vN are vias at no path point)
+3V3: J5.4 J12.4 | length 2704.9
  Top Plane w20: J12.4 v1(1480,-100)
  Power Plane w20: J5.4 27.72,-1427.72 27.72,-887.28 320,-595 320,-135 355,-100 v1(1480,-100)
+5: J5.5 P1_Sens1.3 P1_Sens2.3 P1_Sens3.3 P1_Sens4.3 P1_Sens5.3 P1_Sens6.3 P1_Sens7.3 P1_Sens8.3 P1_Sens9.3 P1_Sens10.3 P1_Sens11.3 R1.2 R6_Prop1.2 R6_Prop2.2 U1.4 U2_Prop1.4 U2_Prop2.4 | length 6780.5
  Top Plane w20: U2_Prop1.4 225.16,-2985 v1(260.16,-3020) ; R6_Prop2.2@257.56,-580 267.56,-570 U2_Prop2.4 355,-570 v1(385,-600) ; R6_Prop1.2 v1(1007.4,-3019.96) ; U1.4 1055.43,-2215 v1(1132.72,-2215) 1150.45,-2232.73 R1.2
  Signal Plane w20: v1(78.5,-906.5) 32.34,-952.66 32.34,-1349.84 82.5,-1400 J5.5 ; P1_Sens1.3 P1_Sens2.3 P1_Sens3.3 P1_Sens4.3 P1_Sens5.3 P1_Sens6.3 P1_Sens7.3 P1_Sens8.3 P1_Sens9.3 P1_Sens10.3 1737,-3375 P1_Sens11.3
  Power Plane w20: v1(78.5,-906.5) v1(385,-600) ; J5.5 190,-1490 190,-1970 ; P1_Sens1.3 472,-3377 270,-3175 270,-3085 ; v1(1007.4,-3019.96) 882.36,-3145 330,-3145 270,-3085 ; v1(1132.72,-2215) 435,-2215 190,-1970 ; 190,-1970 190,-2949.84 v1(260.16,-3020) 270,-3029.84 270,-3085
+12: C2.1 C3.2 C5_Prop1.1 C5_Prop2.1 C6_Prop1.2 C6_Prop2.2 C8.1 C9.2 C10.2 C11.2 J5.8 J10.2 R11.2 R13.2 U1.5 U2_Prop1.5 U2_Prop2.5 U3.4 | length 2509.3
  Top Plane w40: U1.5 1280,-2200 1321.55,-2241.55 C3.2@1321.55,-2291.55 ; C3.2 1328.54,-2300 v2(1388.54,-2360)
  Top Plane w50: R11.2 R13.2 342.83,-87.83 J10.2 J10.2@418.72,-155 ; C5_Prop2.1 361.54,-650.94 C6_Prop2.2 ; C6_Prop1.2 329.06,-3174.61 C2.1 419.45,-3225.55 v2(560,-3085) ; J10.2@414.01,-171.5 482.51,-240 767.8,-240 C8.1 ; U2_Prop1.5 462.28,-3020 v2(470,-3020) ; v1(515,-710) C6_Prop2.2 ; U2_Prop2.5 532.28,-633.66 C6_Prop2.2 ; v2(560,-3085) 600.04,-3045 C5_Prop1.1 ; v2(975,-1683.9) C11.2 C10.2 C9.2 1375,-1673.9 U3.4 ; C3.2 C3.2@1321.55,-2291.55
AGND: C1.1 C2.2 C3.1 C4.2 C5_Prop1.2 C5_Prop2.2 C6_Prop1.1 C6_Prop2.1 C7_Prop1.2 C7_Prop2.2 C8.2 C9.1 C10.1 C11.1 D2.2 D4_Prop1.2 D4_Prop2.2 D5.1 J3.2 J3.3 J3.4 J3.5 J4.3 J4.4 J5.6 J5.7 J10.1 J11.35 J11.36 J12.2 J12.3 P1_Sens1.1 P1_Sens2.1 P1_Sens3.1 P1_Sens4.1 P1_Sens5.1 P1_Sens6.1 P1_Sens7.1 P1_Sens8.1 P1_Sens9.1 P1_Sens10.1 P1_Sens11.1 pad.5 Q1.2 Q2_Prop1.2 Q2_Prop2.2 R3.1 R4.1 R5.1 R8_Prop1.1 R8_Prop2.1 R10_Sens1.1 R10_Sens2.1 R10_Sens3.1 R10_Sens4.1 R10_Sens5.1 R10_Sens6.1 R10_Sens7.1 R10_Sens8.1 R10_Sens9.1 R10_Sens10.1 R10_Sens11.1 R12.1 R14.1 R15_Prop1.1 R15_Prop2.1 R17.1 R19.1 R21.1 U1.1 U1.2 U2_Prop1.1 U2_Prop1.2 U2_Prop2.1 U2_Prop2.2 U3.11 | length 1891.5
  Top Plane w40: U3.11 1375,-1435 1410,-1470 1575,-1470 1590,-1455 1590,-1355 v2(1610,-1335) ; R21.1 1577.09,-1219.41 R15_Prop2.1 1587.09,-1205 v2(1660,-1205) ; 1794.06,-311.06 J3.3
  Top Plane w50: C7_Prop2.2 v1(400,-1355) ; J12.2 1680,-197.01 1794.06,-311.06 v2(1704.57,-311.06)
  Signal Plane w50: v2(1610,-1335) 1660,-1285 v2(1660,-1205)
  Power Plane w50: v2(1704.57,-311.06) J3.5 J3.4
  other v1: 298.35,-2953.31 341.65,-2953.31 298.35,-2910 341.65,-2910 298.35,-2866.69 341.65,-2866.69 1141.06,-2168.31 1184.37,-2168.31 1141.06,-2125 1184.37,-2125 1141.06,-2081.69 1184.37,-2081.69 403.35,-538.31 446.65,-538.31 403.35,-495 446.65,-495 403.35,-451.69 446.65,-451.69
  other v2: 970,-1500
AI1: J6.1 R9_Sens1.1 R10_Sens1.2 | length 900.5
  Top Plane w15: R9_Sens1.1 R10_Sens1.2 v1(630.45,-3185)
  Signal Plane w15: J6.1 255,-2700 630.45,-3075.45 v1(630.45,-3185)
AI2: J6.2 R9_Sens2.1 R10_Sens2.2 | length 1020.9
  Top Plane w15: R9_Sens2.1 R10_Sens2.2 v1(750.45,-3185.45)
  Signal Plane w15: J6.2 205,-2600 750.45,-3145.45 v1(750.45,-3185.45)
AI3: J6.3 R9_Sens3.1 R10_Sens3.2 | length 1159.1
  Top Plane w15: R9_Sens3.1 R10_Sens3.2 v1(870.45,-3185.45)
  Signal Plane w15: J6.3 140.36,-2500 775.45,-3135.09 775.45,-3135.45 825.45,-3185.45 v1(870.45,-3185.45)
AI4: J6.4 R9_Sens4.1 R10_Sens4.2 | length 1318.4
  Top Plane w15: R9_Sens4.1 R10_Sens4.2 v1(988.5,-3185.45)
  Signal Plane w15: J6.4 130,-2400 915.45,-3185.45 v1(988.5,-3185.45)
AI5: J6.5 R9_Sens5.1 R10_Sens5.2 | length 1479.8
  Top Plane w15: R9_Sens5.1 R10_Sens5.2 v1(1108.5,-3185.45)
  Signal Plane w15: J6.5 150,-2300 1035.45,-3185.45 v1(1108.5,-3185.45)
AI6: J6.6 R9_Sens6.1 R10_Sens6.2 | length 1657.2
  Top Plane w15: R9_Sens6.1 R10_Sens6.2 v1(1228.5,-3185)
  Signal Plane w15: J6.6 170,-2200 976.12,-3006.12 976.12,-3032.92 994.45,-3051.24 1021.24,-3051.24 1155,-3185 v1(1228.5,-3185)
AI7: J6.7 R9_Sens7.1 R10_Sens7.2 | length 1802.9
  Top Plane w15: R9_Sens7.1 R10_Sens7.2 v1(1348.5,-3185)
  Signal Plane w15: J6.7 190,-2100 1275,-3185 v1(1348.5,-3185)
AI8: J6.8 R9_Sens8.1 R10_Sens8.2 | length 1964.1
  Top Plane w15: R9_Sens8.1 R10_Sens8.2 v1(1468.5,-3185.45)
  Signal Plane w15: J6.8 210,-2000 1395.45,-3185.45 v1(1468.5,-3185.45)
AI9: J8.1 R9_Sens9.1 R10_Sens9.2 R18.2 U3.7 | length 3374.8
  Top Plane w15: v1(1525,-1795) 1521.5,-1791.5 R18.2 1525,-1661.5 U3.7 ; R9_Sens9.1 R10_Sens9.2 v1(1587.46,-3185)
  Signal Plane w15: J8.1 455,-3245 1527.46,-3245 v1(1587.46,-3185) 1587.46,-1972.46 1525,-1910 v1(1525,-1795)
AI10: J8.2 R9_Sens10.1 R10_Sens10.2 R20.2 U3.8 | length 3971
  Top Plane w15: J8.2 220,-3380 v1(400,-3380) ; U3.8 1525,-1338.5 R20.2 1532.09,-1335 1579.11,-1287.97 1629.48,-1287.97 1657.03,-1315.52 1657.03,-1547.97 v1(1655,-1550) ; R9_Sens10.1 R10_Sens10.2 v1(1708.5,-3185)
  Signal Plane w15: v1(400,-3380) 510,-3270 1623.5,-3270 v1(1708.5,-3185) 1655,-3131.5 v1(1655,-1550) v1@1655,-1545
AI11: J8.3 R9_Sens11.1 R10_Sens11.2 R16.2 U3.1 | length 3870.9
  Top Plane w15: v1(1115,-1606.5) R16.2 1168.15,-1603.35 U3.1 ; v1(1520,-3150) 1753.65,-3150 1828.5,-3224.86 R10_Sens11.2 R9_Sens11.1
  Signal Plane w15: J8.3 280,-3220 1495,-3220 1520,-3195 v1(1520,-3150) 1395.36,-3150 1090,-2844.64 1090,-1631.5 v1(1115,-1606.5)
GPIO1: J7.1 J12.7 | length 1711.1
  Top Plane w15: v1(1280,-769.82) J12.7
  Signal Plane w15: v1(1280,-769.82) 1280,-1410.36 1384.64,-1515 1810,-1515 1850,-1555 1850,-1700 1950,-1800 J7.1
GPIO2: J4.10 J12.8 | length 1595
  Top Plane w15: v1(1380,-769.06) J12.8
  Signal Plane w15: v1(1380,-769.06) 1305,-844.06 1305,-1400 1395,-1490 1910,-1490 1940,-1520 1940,-1580 J4.10
MISO: J4.6 J12.11 | length 1603.2
  Top Plane w15: v1(1680,-840) J12.11
  Signal Plane w15: v1(1680,-840) 1645,-875 1435,-875 1405,-905 1405,-1358.58 1436.42,-1390 1855.37,-1390 2000,-1245.37 J4.6
MOSI: J4.7 J12.10 | length 1540.9
  Top Plane w15: v1(1575,-840) 1575,-670.59 J12.10
  Signal Plane w15: v1(1575,-840) 1430.71,-840 1380,-890.71 1380,-1368.93 1426.07,-1415 1925,-1415 J4.7
NetC1_2: C1.2 R3.2 R4.2 R5.2 U1.7 | length 522.5
  Top Plane w40: U1.7 1316.1,-2100 1391.1,-2025
  Top Plane w50: R3.2 R4.2 R5.2 1339.46,-1982.09 C1.2 1366.1,-1981.1 1391.1,-2006.1 1391.1,-2025
NetC4_1: C4.1 J1.2 L1.2 | length 1322.5
  Top Plane w50: v2(1720,-2555) 1838.95,-2673.95 L1.2
  Signal Plane w50: v2(1720,-2555) 1705,-2540 1705,-2210 v2(1760,-2155) 1730,-2155 1708.5,-2133.5 1708.5,-1606.5 1733.5,-1581.5 J1.2
NetC7_Prop1_1: C7_Prop1.1 J2_Prop1.2 L2_Prop1.2 | length 2925.3
  Top Plane w50: L2_Prop1.2 253.03,-2444.17 C7_Prop1.1 535,-1757.8 535,-1380.74 920.74,-995 v1(1460,-995)
  Signal Plane w50: v1(1460,-995) 1592.09,-995 J2_Prop1.2
NetC7_Prop2_1: C7_Prop2.1 J2_Prop2.2 L2_Prop2.2 | length 1257.5
  Top Plane w30: L2_Prop2.2 1270,-1280 1674.17,-875.83 1792.09,-875.83 J2_Prop2.2
  Top Plane w50: C7_Prop2.1 812.2,-1280 L2_Prop2.2
NetD1_1: D1.1 Q1.3 | length 63.7
  Top Plane w15: Q1.3 1081.32,-2268.5 D1.1
NetD1_2: D1.2 R1.1 | length 51.6
  Top Plane w15: D1.2 1146.51,-2331.5 R1.1
NetD2_1: D2.1 L1.1 U1.6 | length 1558.9
  Top Plane w40: U1.6 1323.26,-2150 1568.25,-2394.99
  Top Plane w50: L1.1 1311.5,-2720 1568.25,-2463.25 ; 1568.25,-2394.99 1568.25,-2463.25 ; D2.1@1720.28,-1857.91 1675,-1903.19 1675,-2356.5 1568.25,-2463.25
NetD3_Prop1_1: D3_Prop1.1 Q2_Prop1.3 | length 95.3
  Top Plane w15: Q2_Prop1.3 890.63,-2879.37 D3_Prop1.1
NetD3_Prop1_2: D3_Prop1.2 R6_Prop1.1 | length 50.3
  Top Plane w15: D3_Prop1.2 965,-2882 R6_Prop1.1
NetD3_Prop2_1: D3_Prop2.1 Q2_Prop2.3 | length 156
  Top Plane w15: D3_Prop2.1 170,-340 224.37,-285.63 Q2_Prop2.3
NetD3_Prop2_2: D3_Prop2.2 R6_Prop2.1 | length 156.9
  Top Plane w15: D3_Prop2.2 170,-470 202.44,-502.44 R6_Prop2.1@202.44,-580
NetD4_Prop1_1: D4_Prop1.1 L2_Prop1.1 U2_Prop1.6 | length 807.2
  Top Plane w30: U2_Prop1.6 540,-2935 560,-2915 560,-2621.97 L2_Prop1.1 656.97,-2551.69 D4_Prop1.1
NetD4_Prop2_1: D4_Prop2.1 L2_Prop2.1 U2_Prop2.6 | length 1034.1
  Top Plane w30: U2_Prop2.6 595,-520 669.72,-594.72 D4_Prop2.1 710,-985 818.94,-876.06 L2_Prop2.1
NetD5_2: D5.2 R13.1 | length 79.1
  Top Plane w20: R13.1 308.74,-217.76 D5.2
NetJ1_1: J1.1 R14.2 U3.3 | length 894.7
  Top Plane w50: R14.2 1260,-1465 v2(1290.41,-1495.41) 1320.83,-1525.83 1320.83,-1570 ; v2(1600,-1790) 1602.52,-1787.48 1684.02,-1787.48 J1.1
  Signal Plane w50: v2(1290.41,-1495.41) 1585,-1790 v2(1600,-1790)
NetJ3_1: J3.1 J12.1 | length 288.9
  Top Plane w20: J12.1 1780,-180 1802.01,-202.01 J3.1@1994.17,-202.01
NetP1_Sens1_2: P1_Sens1.2 R9_Sens1.2 | length 210.8
  Top Plane w15: P1_Sens1.2 703.97,-3429.97 703.97,-3357.52 693.44,-3346.99 R9_Sens1.2
NetP1_Sens2_2: P1_Sens2.2 R9_Sens2.2 | length 210.8
  Top Plane w15: P1_Sens2.2 823.97,-3429.97 823.97,-3357.52 813.44,-3346.99 R9_Sens2.2
NetP1_Sens3_2: P1_Sens3.2 R9_Sens3.2 | length 210.8
  Top Plane w15: P1_Sens3.2 943.97,-3429.97 943.97,-3357.52 933.44,-3346.99 R9_Sens3.2
NetP1_Sens4_2: P1_Sens4.2 R9_Sens4.2 | length 210.8
  Top Plane w15: P1_Sens4.2 1062.03,-3429.97 1062.03,-3357.52 1051.5,-3346.99 R9_Sens4.2
NetP1_Sens5_2: P1_Sens5.2 R9_Sens5.2 | length 210.8
  Top Plane w15: P1_Sens5.2 1182.03,-3429.97 1182.03,-3357.52 1171.5,-3346.99 R9_Sens5.2
NetP1_Sens6_2: P1_Sens6.2 R9_Sens6.2 | length 210.8
  Top Plane w15: P1_Sens6.2 1302.03,-3429.97 1302.03,-3357.52 1291.5,-3346.99 R9_Sens6.2
NetP1_Sens7_2: P1_Sens7.2 R9_Sens7.2 | length 210.8
  Top Plane w15: P1_Sens7.2 1422.03,-3429.97 1422.03,-3357.52 1411.5,-3346.99 R9_Sens7.2
NetP1_Sens8_2: P1_Sens8.2 R9_Sens8.2 | length 210.8
  Top Plane w15: P1_Sens8.2 1542.03,-3429.97 1542.03,-3357.52 1531.5,-3346.99 R9_Sens8.2
NetP1_Sens9_2: P1_Sens9.2 R9_Sens9.2 | length 211.3
  Top Plane w15: P1_Sens9.2 1662.03,-3429.97 1662.03,-3357.52 1650.45,-3345.94 R9_Sens9.2
NetP1_Sens10_2: P1_Sens10.2 R9_Sens10.2 | length 210.8
  Top Plane w15: P1_Sens10.2 1782.03,-3429.97 1782.03,-3357.52 1771.5,-3346.99 R9_Sens10.2
NetP1_Sens11_2: P1_Sens11.2 R9_Sens11.2 | length 208.8
  Top Plane w15: P1_Sens11.2 1902.03,-3427.97 1902.03,-3355.52 1891.5,-3344.99 R9_Sens11.2
NetQ1_1: Q1.1 R2.2 | length 59.8
  Top Plane w15: Q1.1 980,-2253.68 R2.2
NetQ2_Prop1_1: Q2_Prop1.1 R7_Prop1.2 | length 60
  Top Plane w15: Q2_Prop1.1 885.63,-2800.63 R7_Prop1.2@895,-2810
NetQ2_Prop2_1: Q2_Prop2.1 R7_Prop2.2 | length 59.3
  Top Plane w15: Q2_Prop2.1 245,-376.77 R7_Prop2.2
NetR8_Prop1_2: R8_Prop1.2 U2_Prop1.7 | length 90.1
  Top Plane w30: U2_Prop1.7 467.91,-2885 R8_Prop1.2@502.91,-2850
NetR8_Prop2_2: R8_Prop2.2 U2_Prop2.7 | length 202.6
  Top Plane w30: U2_Prop2.7 575,-470 590,-455 590,-380 R8_Prop2.2@545,-335
NetR16_1: R16.1 R17.2 U3.2 | length 228.1
  Top Plane w15: R17.2@1100,-1543.5 1263.5,-1543.5 1275,-1555 U3.2
NetR18_1: R18.1 R19.2 U3.6 | length 128.5
  Top Plane w15: R19.2@1458.5,-1725 R18.1 1475,-1648.5 U3.6
NetR20_1: R20.1 R21.2 U3.9 | length 128.5
  Top Plane w15: R21.2 R20.1 1475,-1351.5 U3.9
nIRQ: J4.9 J12.5 | length 2069.6
  Top Plane w15: v1(1380,-225) J12.5
  Signal Plane w15: v1(1380,-225) 1430,-275 1430,-763.29 1330,-863.29 1330,-1389.64 1405.36,-1465 1925,-1465 J4.9
PWM1: J8.6 R7_Prop1.1 U2_Prop1.3 | length 1220.4
  Top Plane w15: J8.6 110,-3100 155,-3055 155,-2955 175,-2935 185,-2935 U2_Prop1.3 ; v1(410,-3100) 470,-3100 730,-2840 916.5,-2840 R7_Prop1.1
  Signal Plane w15: J8.6 v1(410,-3100)
PWM2: J8.8 R7_Prop2.1 U2_Prop2.3 | length 2569.3
  Top Plane w15: J8.8 100,-2800 152.5,-2747.5 152.5,-1912.5 v1(150,-1910) ; v1(240,-525) 245,-520 R7_Prop2.1 283.5,-520 U2_Prop2.3
  Signal Plane w15: v1(150,-1910) 152.5,-1907.5 152.5,-687.5 240,-600 v1(240,-525)
PWMP: J8.5 R2.1 U1.3 | length 2469.2
  Top Plane w15: v1(70,-1905) 115,-1860 v1(260,-1860) ; v1(790,-2145) R2.1@980,-2145 ; R2.1 986.5,-2150 U1.3
  Signal Plane w15: v1(70,-1905) 25.41,-1949.59 25.41,-3125.41 J8.5 ; v1(260,-1860) 320,-1860 605,-2145 v1(790,-2145)
SCLK: J4.5 J12.9 | length 878.2
  Top Plane w15: v1(1475,-915.36) 1475,-690.59 1480,-685.59 1475,-680.59 1485,-670.59 J12.9
  Signal Plane w15: v1(1475,-915.36) 1504.64,-945 1605,-945 1800,-1140 J4.5
SENS1: J2_Prop1.1 R15_Prop1.2 U3.5 | length 750
  Top Plane w30: U3.5 1425,-1560 1455,-1530 1575,-1530 1600,-1555 R15_Prop1.2 1600,-1620 1665,-1620 1695,-1590 1695,-1460 1790,-1365 J2_Prop1.1
SENS2: J2_Prop2.1 R15_Prop2.2 U3.10 | length 649.1
  Top Plane w30: U3.10 1425,-1374.25 1415.79,-1365.04 1415.79,-1242.13 R15_Prop2.2 1685,-972.91 J2_Prop2.1
SS: J4.8 J12.12 | length 1748
  Top Plane w15: v1(1780,-769.82) J12.12
  Signal Plane w15: v1(1780,-769.82) 1748.72,-801.1 1427.55,-801.1 1355,-873.65 1355,-1379.29 1415.71,-1440 J4.8
VoltageSense: J8.4 R11.1 R12.2 | length 3346.9
  Top Plane w15: v1(47.5,-750) 25,-772.5 25,-3225 J8.4 ; R12.2 55,-240 115,-300 v1@145.75,-300 ; v1(146.5,-300) v1@145.75,-300 ; R11.1 146.5,-299.25 v1@145.75,-300
  Signal Plane w15: v1(47.5,-750) 47.5,-747.5 200,-595 200,-355 146.5,-301.5 v1(146.5,-300)
pads on no net: J1.MH1 J1.MH2 J2_Prop1.MH1 J2_Prop1.MH2 J2_Prop2.MH1 J2_Prop2.MH2 J4.1 J4.2 J5.1 J5.2 J5.3 J7.2 J7.3 J7.4 J7.5 J7.6 J7.7 J7.8 J8.7 J9.1 J9.2 J9.3 J9.4 J9.5 J9.6 J9.7 J9.8 J10.MH1 J10.MH2 J11.1 J11.2 J11.3 J11.4 J11.5 J11.6 J11.7 J11.8 J11.9 J11.10 J11.11 J11.12 J11.13 J11.14 J11.15 J11.16 J11.17 J11.18 J11.19 J11.20 J11.21 J11.22 J11.23 J11.24 J11.25 J11.26 J11.27 J11.28 J11.29 J11.30 J11.31 J11.32 J11.33 J11.34 J12.6 U1.8 U2_Prop1.8 U2_Prop2.8 U3.12 U3.13 U3.14

## Polygon pours and split planes (outlines as drawn)
no net on Top Plane (solid, remove dead copper, pour order 124): 1115,-2060 1215,-2060 1215,-2190 1115,-2190
no net on Top Plane (solid, remove dead copper, pour order 116): 375,-430 475,-430 475,-560 375,-560
no net on Top Plane (solid, remove dead copper, pour order 108): 270,-2845 370,-2845 370,-2975 270,-2975
AGND on Top Plane "Top Plane-AGND" (solid, remove dead copper, pour order 4): 0,0 2100,0 2100,-3840 2040,-3900 1590,-3900 1490,-4000 200,-4000 100,-3900 -0.01,-3900 0,-3899.99
no net on Top Plane "Top Plane-No Net" (solid, pour order 24): 375,-430 475,-430 475,-560 375,-560
no net on Top Plane "Top Plane-No Net 1" (solid, pour order 22): 375,-430 475,-430 475,-560 375,-560
no net on Top Plane "Top Plane-No Net 2" (solid, pour order 20): 375,-430 475,-430 475,-560 375,-560
no net on Top Plane "Top Plane-No Net 3" (solid, pour order 18): 375,-430 475,-430 475,-560 375,-560
no net on Top Plane "Top Plane-No Net 4" (solid, pour order 40): 1162.72,-2060 1262.72,-2060 1262.72,-2190 1162.72,-2190
no net on Top Plane "Top Plane-No Net 5" (solid, pour order 38): 1162.72,-2060 1262.72,-2060 1262.72,-2190 1162.72,-2190
no net on Top Plane "Top Plane-No Net 6" (solid, pour order 36): 1162.72,-2060 1262.72,-2060 1262.72,-2190 1162.72,-2190
no net on Top Plane "Top Plane-No Net 7" (solid, pour order 34): 1162.72,-2060 1262.72,-2060 1262.72,-2190 1162.72,-2190
no net on Top Plane "Top Plane-No Net 8" (solid, pour order 32): 270,-2845 370,-2845 370,-2975 270,-2975
no net on Top Plane "Top Plane-No Net 9" (solid, pour order 30): 270,-2845 370,-2845 370,-2975 270,-2975
no net on Top Plane "Top Plane-No Net 10" (solid, pour order 28): 270,-2845 370,-2845 370,-2975 270,-2975
no net on Top Plane "Top Plane-No Net 11" (solid, pour order 26): 270,-2845 370,-2845 370,-2975 270,-2975
AGND on Top Plane "Top Plane-AGND 1" (solid, pour order 2): -100,-580
AGND on Ground Plane (solid, remove dead copper, pour order 126): 1115,-2059.71 1215,-2059.71 1215,-2189.71 1115,-2189.71
AGND on Ground Plane (solid, remove dead copper, pour order 118): 375,-429.71 475,-429.71 475,-559.71 375,-559.71
AGND on Ground Plane (solid, remove dead copper, pour order 110): 270,-2844.71 370,-2844.71 370,-2974.71 270,-2974.71
AGND on Ground Plane "Ground Plane-AGND" (solid, remove dead copper, pour order 6): 0,0 2100,0 2100,-3840 2040,-3900 1590,-3900 1490,-4000 200,-4000 100,-3900 -0.01,-3900 0,-3899.99
AGND on Signal Plane (solid, remove dead copper, pour order 128): 1115,-2059.71 1215,-2059.71 1215,-2189.71 1115,-2189.71
AGND on Signal Plane (solid, remove dead copper, pour order 120): 375,-429.71 475,-429.71 475,-559.71 375,-559.71
AGND on Signal Plane (solid, remove dead copper, pour order 112): 270,-2844.71 370,-2844.71 370,-2974.71 270,-2974.71
AGND on Signal Plane "Signal Plane-AGND" (solid, remove dead copper, pour order 0): 0,0 2100,0 2100,-3840 2040,-3900 1590,-3900 1490,-4000 200,-4000 100,-3900 -0.01,-3900 0,-3899.99
+12 on Power Plane "Power Plane-+12" (solid, remove dead copper, pour order 8): 0,0 2100,0 2100,-3840 2040,-3900 1590,-3900 1490,-4000 200,-4000 100,-3900 -0.01,-3900 0,-3899.99
AGND on Power Plane (solid, remove dead copper, pour order 130): 1115,-2059.71 1215,-2059.71 1215,-2189.71 1115,-2189.71
AGND on Power Plane (solid, remove dead copper, pour order 122): 375,-429.71 475,-429.71 475,-559.71 375,-559.71
AGND on Power Plane (solid, remove dead copper, pour order 114): 270,-2844.71 370,-2844.71 370,-2974.71 270,-2974.71

## Keep-outs
Keep-Out Layer:
  lines w10: -0.01,-3861 ccw(c39,-3861) 38,-3900 100,-3900 200,-4000 1490,-4000 1590,-3900 2040,-3900 2100,-3840 2100,0 0,0 0,-3861

## Other copper
Top Plane:
  rectangle net AGND: 1114.55,-2190 1215,-2060.29
  rectangle net AGND: 269.55,-2975 370,-2845.29
  rectangle net AGND: 374.55,-560 475,-430.29
Signal Plane:
  rectangle net AGND: 1114.55,-2190 1215,-2060.29
  rectangle net AGND: 269.55,-2975 370,-2845.29
  rectangle net AGND: 374.55,-560 475,-430.29
Ground Plane:
  rectangle net AGND: 1114.55,-2190 1215,-2060.29
  rectangle net AGND: 269.55,-2975 370,-2845.29
  rectangle net AGND: 374.55,-560 475,-430.29
Power Plane:
  rectangle net AGND: 1114.55,-2189.71 1215,-2060
  rectangle net AGND: 269.55,-2974.71 370,-2845
  rectangle net AGND: 374.55,-559.71 475,-430

## Silkscreen, mask and mechanical layers (free items; w line width, h text height)
Top Overlay:
  text "+" at 317.72,-45 h30
  text "-" at 582.48,-45 h30
  text "Power" at 580,-90 h30
  text "Pump" at 1810,-800 h30
  text "Fan" at 1830,-1120 h30
  text "Peltier" at 1740,-1510 h30
  text "[1..11]" at 1130,-3155 h30